# EAGLE board ADC:LED (EAGLE 7.4.0)
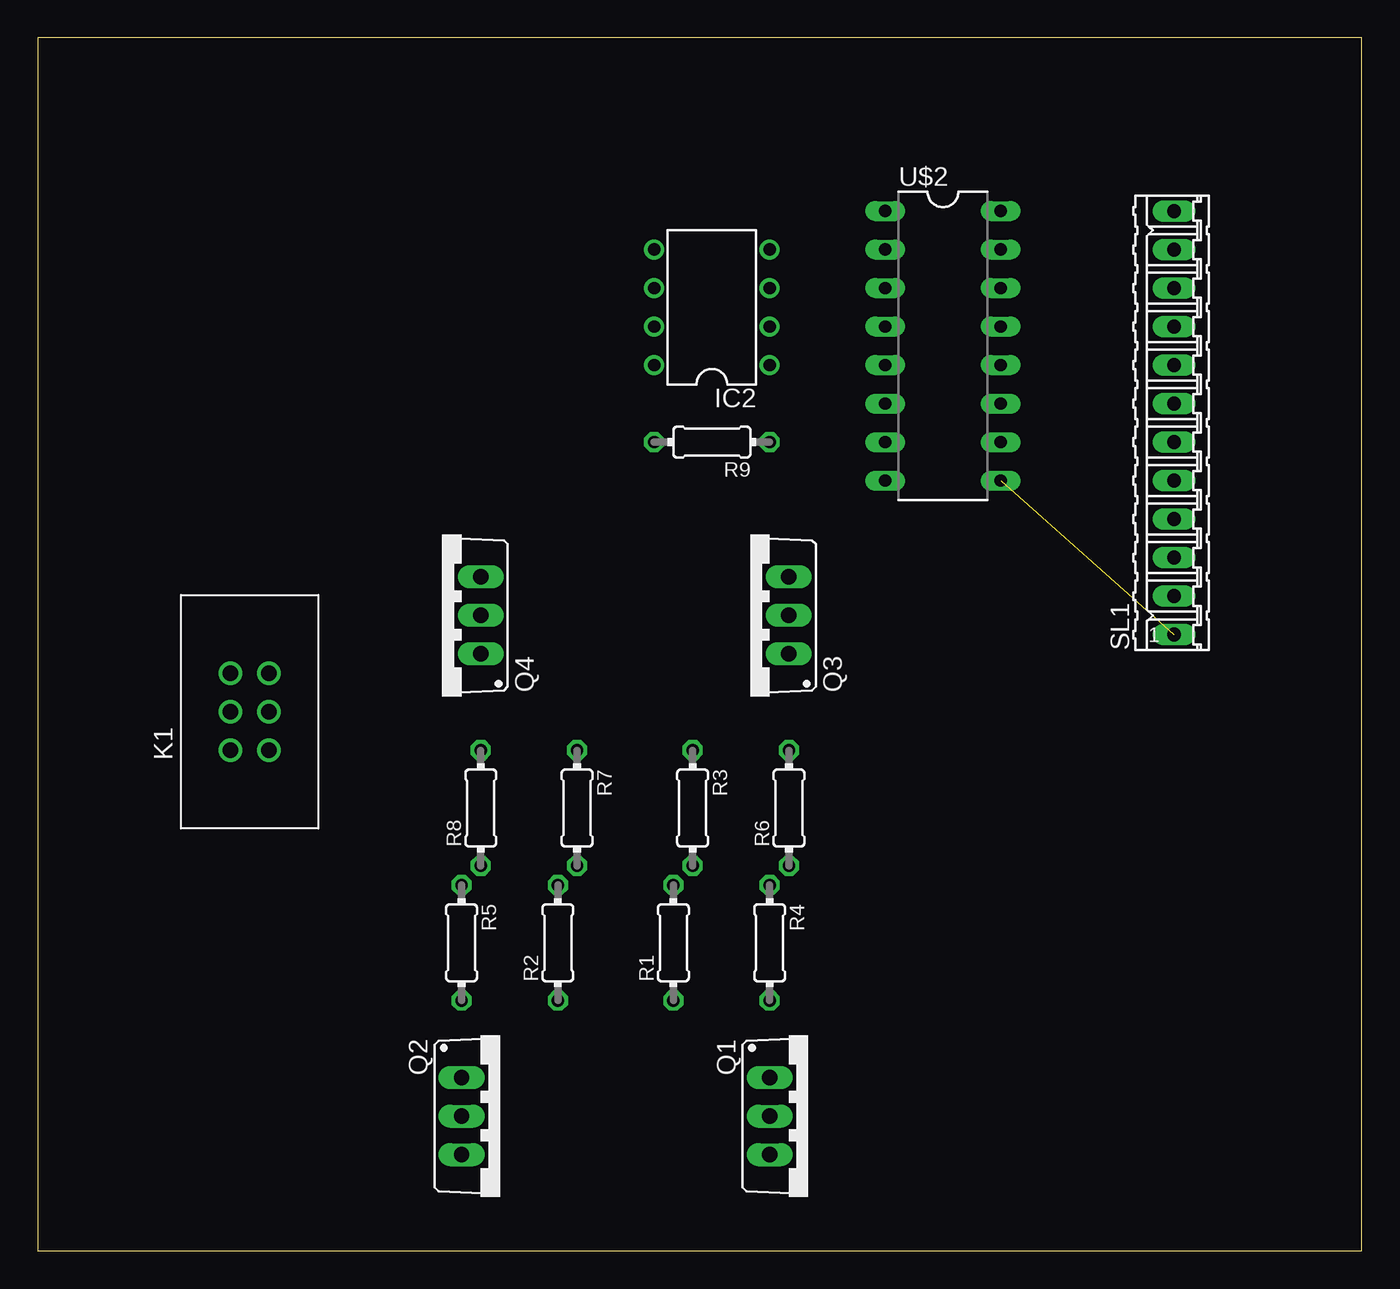
[diagram p0: board, top side]
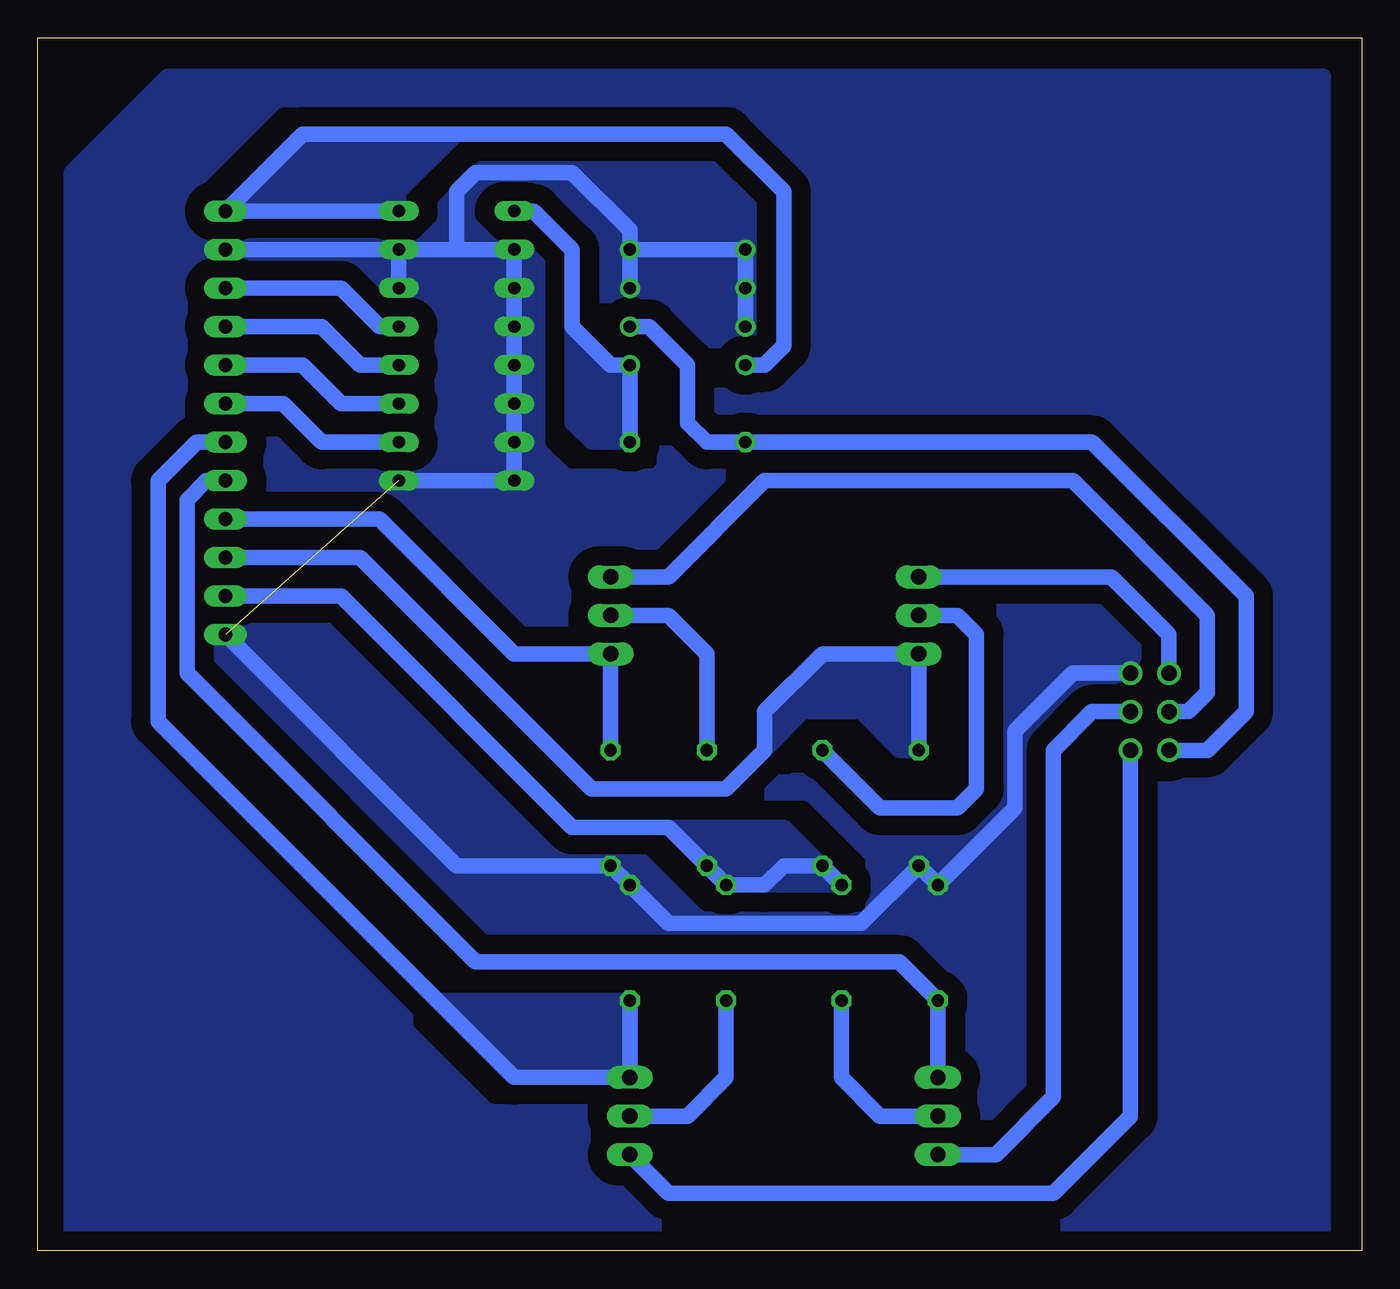
[diagram p1: board, bottom side, seen from below]

Size 87.3 x 80 mm. Coordinates in mm from the lower left corner, seen from the top.
Outline: 0,0 87.3,0 87.3,80 0,80 0,0
Copper layers (1*16): Top 0.035mm / dielectric 1.5mm / Bottom 0.035mm
Design rules "default": minimum track width 10mil, minimum drill 24mil, track to track 8mil, track to pad 8mil, pad to pad 8mil, via to via 8mil, smd to smd 8mil, copper to edge 40mil, drill to drill 8mil, minimum pad ring 10mil, minimum via ring 8mil, stop-mask expansion 4mil, vias tented up to drill 0mil, thermal gap 10mil

## Footprints (pad centres in the part's own frame; a part is rotated, then mirrored left to right if it is on the bottom)
DIL08 = drill 0.813 pad 1.27: 1 -3.81,-3.81; 2 -1.27,-3.81; 3 1.27,-3.81; 4 3.81,-3.81; 5 3.81,3.81; 6 1.27,3.81; 7 -1.27,3.81; 8 -3.81,3.81
612006235121 = drill 1.02: 1 -2.54,-1.27; 2 -2.54,1.27; 3 0,-1.27; 4 0,1.27; 5 2.54,-1.27; 6 2.54,1.27
TO220BV = drill 1.016 long: D 0,-2.54; G -2.54,-2.54; S 2.54,-2.54
0204/7 = drill 0.813 octagon: 1 -3.81,0; 2 3.81,0
12P = drill 0.914 long: 1 -13.97,0; 2 -11.43,0; 3 -8.89,0; 4 -6.35,0; 5 -3.81,0; 6 -1.27,0; 7 1.27,0; 8 3.81,0; 9 6.35,0; 10 8.89,0; 11 11.43,0; 12 13.97,0
DIL16 = drill 0.813 long: 1 -8.89,-3.81; 2 -6.35,-3.81; 3 -3.81,-3.81; 4 -1.27,-3.81; 5 1.27,-3.81; 6 3.81,-3.81; 7 6.35,-3.81; 8 8.89,-3.81; 9 8.89,3.81; 10 6.35,3.81; 11 3.81,3.81; 12 1.27,3.81; 13 -1.27,3.81; 14 -3.81,3.81; 15 -6.35,3.81; 16 -8.89,3.81

## Placement (x,y rotation side)
IC2  LM358N  [DIL08]  44.45,62.23 90 top
K1  612006235121  [612006235121]  13.97,35.56 90 top
Q1  IRF512  [TO220BV]  50.8,8.89 270 top
Q2  IRF512  [TO220BV]  30.48,8.89 270 top
Q3  IRF512  [TO220BV]  46.99,41.91 90 top
Q4  IRF512  [TO220BV]  26.67,41.91 90 top
R1  [0204/7]  41.91,20.32 90 top
R2  [0204/7]  34.29,20.32 90 top
R3  [0204/7]  43.18,29.21 270 top
R4  [0204/7]  48.26,20.32 270 top
R5  [0204/7]  27.94,20.32 270 top
R6  [0204/7]  49.53,29.21 90 top
R7  [0204/7]  35.56,29.21 270 top
R8  [0204/7]  29.21,29.21 90 top
R9  [0204/7]  44.45,53.34 180 top
SL1  [12P]  74.93,54.61 90 top
U$2  MCP3008P  [DIL16]  59.69,59.69 270 top

## Library data of the parts
IC2 = linear
K1 = Wurth_Elektronik_Electromechanic_Wire_to_Board_Connectors_rev15c
Q1-Q4 = transistor-power
R1-R9 = resistor
SL1 = con-amp-quick; OC_FARNELL: unknown; OC_NEWARK: unknown
U$2 = MCP3008

## Nets
12V: R1.2 R2.2 R3.2 R7.2 SL1.2
*CS: SL1.7 U$2.10
AIN: IC2.1 R9.1 U$2.1
CLK: SL1.10 U$2.13
CTRL1: Q1.G R4.2 SL1.6
CTRL2: Q2.G R5.2 SL1.5
CTRL3: Q3.G R6.2 SL1.4
CTRL4: Q4.G R8.2 SL1.3
DIN: SL1.8 U$2.11
DOUT: SL1.9 U$2.12
GND: IC2.3 IC2.4 IC2.5 IC2.6 IC2.7 K1.5 R4.1 R5.1 R6.1 R8.1 SL1.1 SL1.11 U$2.2 U$2.3 U$2.4 U$2.5 U$2.6 U$2.7 U$2.8 U$2.9 U$2.14 U$2.15
LED1: K1.1 Q1.S
LED2: K1.3 Q2.S
LED3: K1.4 Q3.S
LED4: K1.6 Q4.S
N$1: Q1.D R1.1
N$2: Q2.D R2.1
N$9: Q3.D R3.1
N$20: Q4.D R7.1
PHD: IC2.2 K1.2 R9.2
VDD: IC2.8 SL1.12 U$2.16

## Tracks (layer width: path | path; a pad name or v marks a point on that pad's centre or on a via)
12V
  Bottom 1.016: R2.2 R7.2 38.1,25.4 39.37,24.13 R1.2 R3.2 45.72,27.94 52.07,27.94 67.31,43.18 SL1.2
  pour Bottom (no thermals): 34.29,24.13 41.91,24.13 45.72,27.94 38.1,27.94
*CS
  Bottom 1.016: U$2.10 68.58,53.34 71.12,55.88 SL1.7
AIN
  Bottom 1.016: R9.1 IC2.1 49.53,58.42 52.07,60.96 52.07,66.04 54.61,68.58 U$2.1
  pour Bottom (no thermals): 48.26,53.34 50.8,53.34 52.07,54.61 52.07,60.96 49.53,58.42 48.26,58.42
CLK
  Bottom 1.016: U$2.13 64.77,60.96 67.31,63.5 SL1.10
CTRL1
  Bottom 1.016: SL1.6 76.83,53.34 79.38,50.8 79.38,34.92 55.88,11.43 Q1.G R4.2
  pour Bottom (no thermals): 48.26,16.51 60.96,16.51 55.88,11.43 48.26,11.43
CTRL2
  Bottom 1.016: Q2.G R5.2 30.48,19.05 58.42,19.05 77.47,38.1 77.47,49.53 76.2,50.8 SL1.5
CTRL3
  Bottom 1.016: R6.2 Q3.G 55.88,39.37 64.77,48.26 SL1.4
CTRL4
  Bottom 1.016: R8.2 Q4.G 35.56,39.37 39.37,35.56 39.37,33.02 41.91,30.48 50.8,30.48 66.04,45.72 SL1.3
  pour Bottom (no thermals): 29.21,33.02 30.48,33.02 33.02,35.56 36.83,35.56 39.37,33.02 39.37,35.56 35.56,39.37 29.21,39.37
DIN
  Bottom 1.016: U$2.11 67.31,55.88 69.85,58.42 SL1.8
DOUT
  Bottom 1.016: U$2.12 66.04,58.42 68.58,60.96 SL1.9
GND  (1 unrouted)
  Bottom 1.016: U$2.14 U$2.15 | U$2.9 U$2.8 U$2.7 U$2.6 U$2.5 U$2.4 U$2.3 U$2.2 59.69,66.04 | SL1.11 U$2.15 | 59.69,66.04 U$2.15 | IC2.3 IC2.4 | IC2.4 48.26,67.31 52.07,71.12 58.42,71.12 59.69,69.85 59.69,66.04 | IC2.7 IC2.6 IC2.5 IC2.4 | K1.5 19.05,38.1 22.86,34.29 22.86,29.21 R5.1 R8.1 33.02,21.59 45.72,21.59 R4.1 R6.1 59.69,25.4 SL1.1
  pour Bottom (no thermals): 48.26,63.5 45.72,63.5 43.18,60.96 40.64,60.96 40.64,68.58 43.18,71.12 52.07,71.12 48.26,67.31
  pour Bottom (no thermals): 33.02,21.59 30.48,21.59 26.67,25.4 29.21,25.4
  pour Bottom (no thermals): 60.96,50.8 59.69,52.07 59.69,62.23 60.96,63.5 63.5,63.5 63.5,66.04 62.23,66.04 59.69,68.58 57.15,66.04 55.88,66.04 55.88,50.8
  pour Bottom (no thermals): 63.5,63.5 66.04,66.04 63.5,66.04
  pour Bottom (no thermals): 59.69,25.4 72.39,38.1 74.93,40.64 68.58,40.64 53.34,25.4
  pour Bottom (no thermals): 45.72,21.59 55.88,21.59 59.69,25.4 49.53,25.4
  pour Bottom (isolate 1.27, rank 3, no thermals): 2.54,77.47 78.74,77.47 85.09,71.12 85.09,0.64 5.71,0.64 2.54,0.64
LED1
  Bottom 1.016: K1.1 15.24,8.89 20.32,3.81 45.72,3.81 Q1.S
LED2
  Bottom 1.016: K1.3 17.78,35.56 20.32,33.02 20.32,10.16 24.13,6.35 Q2.S
LED3
  Bottom 1.016: K1.4 11.43,35.56 10.16,36.83 10.16,41.91 19.05,50.8 39.37,50.8 45.72,44.45 Q3.S
LED4
  Bottom 1.016: K1.6 12.7,40.64 16.51,44.45 Q4.S
N$1
  Bottom 1.016: Q1.D 44.45,8.89 41.91,11.43 R1.1
N$2
  Bottom 1.016: R2.1 34.29,11.43 31.75,8.89 Q2.D
N$9
  Bottom 1.016: R3.1 43.18,39.37 45.72,41.91 Q3.D
N$20
  Bottom 1.016: R7.1 31.75,29.21 26.67,29.21 25.4,30.48 25.4,40.64 26.67,41.91 Q4.D
PHD
  Bottom 1.016: IC2.2 46.99,60.96 44.45,58.42 44.45,54.61 43.18,53.34 R9.2 17.78,53.34 7.62,43.18 7.62,35.56 10.16,33.02 K1.2
VDD
  Bottom 1.016: U$2.16 SL1.12 69.85,73.66 41.91,73.66 38.1,69.85 38.1,59.69 39.37,58.42 IC2.8
  pour Bottom (no thermals): 63.5,68.58 63.5,69.85 59.69,73.66 69.85,73.66 74.93,68.58